# EAGLE board Bmp180Shield (EAGLE 7.4.0)
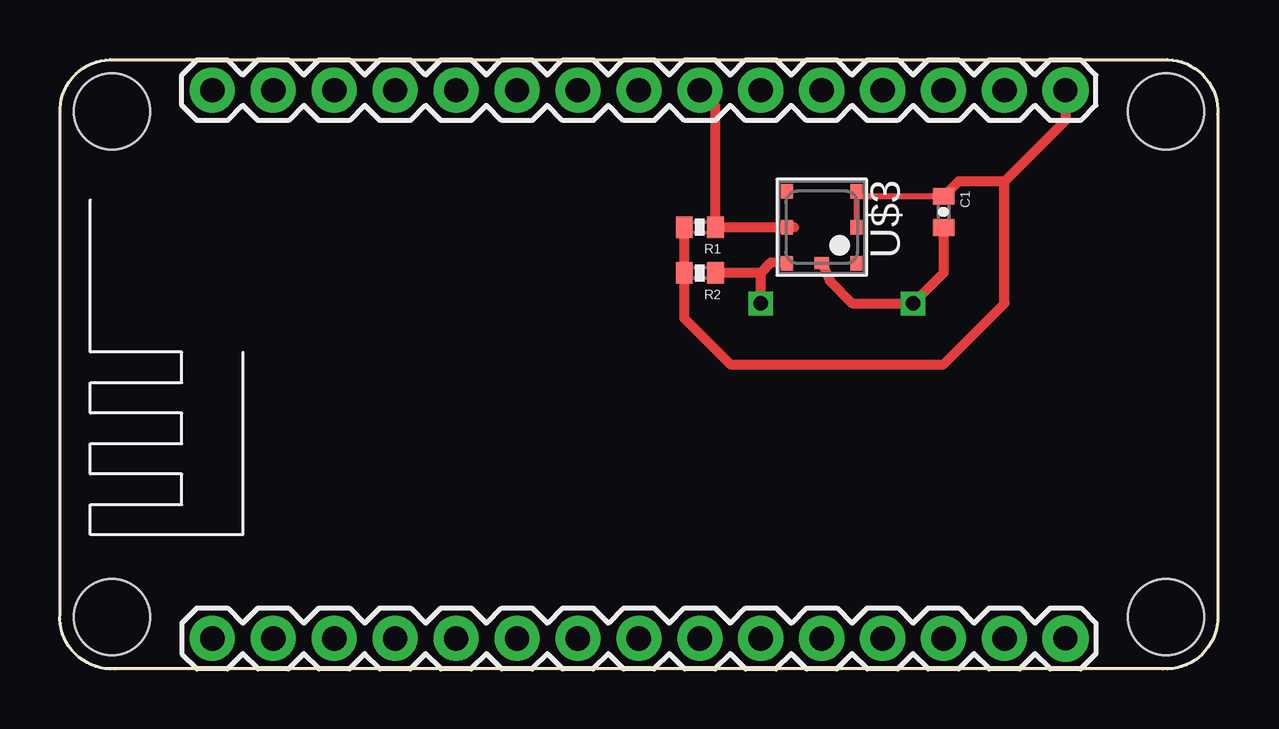
[diagram p0: board, top side]
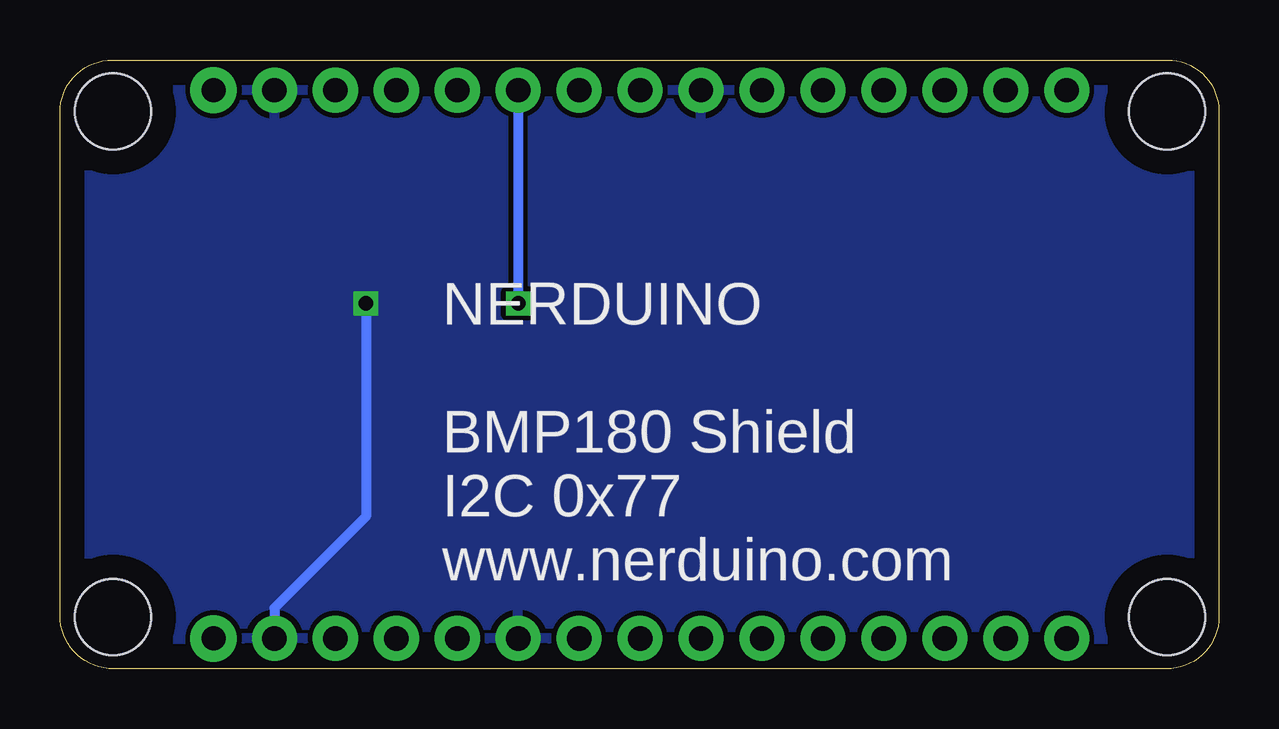
[diagram p1: board, bottom side, seen from below]

Size 48.31 x 25.39 mm. Coordinates in mm from the lower left corner, seen from the top.
Outline: 0,23.24 0,2.19 arc90 2.19,0 46.08,0 arc90 48.31,2.23 48.31,23.2 arc90 46.13,25.39 2.15,25.39 arc90 0,23.24
Copper layers (1*16): Top 0.035mm / dielectric 1.5mm / Bottom 0.035mm
Design rules "default": minimum track width 10mil, minimum drill 24mil, track to track 8mil, track to pad 8mil, pad to pad 8mil, via to via 8mil, smd to smd 8mil, copper to edge 40mil, drill to drill 8mil, minimum pad ring 10mil, minimum via ring 8mil, stop-mask expansion 4mil, vias tented up to drill 0mil, thermal gap 10mil

## Footprints (pad centres in the part's own frame; a part is rotated, then mirrored left to right if it is on the bottom)
0402-CAP = smd 0.7 x 0.9: 1 -0.65,0; 2 0.65,0
0402-RES = smd 0.7 x 0.9: 1 -0.65,0; 2 0.65,0
NERDUINO_STACK = drill 1.016 pad 1.88: 1 -17.78,-5.08; 2 -15.24,-5.08; 3 -12.7,-5.08; 4 -10.16,-5.08; 5 -7.62,-5.08; 6 -5.08,-5.08; 7 -2.54,-5.08; 8 0,-5.08; 9 2.54,-5.08; 10 5.08,-5.08; 11 7.62,-5.08; 12 10.16,-5.08; 13 12.7,-5.08; 14 15.24,-5.08; 17 15.24,17.78; 18 12.7,17.78; 19 10.16,17.78; 20 7.62,17.78; 21 5.08,17.78; 22 2.54,17.78; 23 0,17.78; 24 -2.54,17.78; 25 -5.08,17.78; 26 -7.62,17.78; 27 -10.16,17.78; 28 -12.7,17.78; 29 -15.24,17.78; 30 -17.78,17.78 | drill 1 pad 1.93: 15 17.78,-5.08; 16 17.78,17.78 | hole 3.175: -21.971,16.891; -21.971,-4.191; 21.971,-4.191; 21.971,16.891
BMP180 = smd 0.6 x 0.5: 1 1.5,1.45; 2 0,1.45; 3 -1.5,1.45; 4 -1.5,-1.45; 5 0,-1.45; 6 1.5,-1.45 | smd 0.5 x 0.6: 7 1.5,0

## Placement (x,y rotation side)
C1  0.1uF  [0402-CAP]  36.83,19.05 270 top
R1  4.7k  [0402-RES]  26.67,18.41 180 top
R2  4.7k  [0402-RES]  26.67,16.51 180 top
U$1  NERDSHIELD  [NERDUINO_STACK]  24.13,6.35 0 top
U$3  BMP180  [BMP180]  31.75,18.41 270 top

## Library data of the parts
C1 R1 R2 = SparkFun
U$1 = NerduinoShieldLib
U$3 = SparkFun-Sensors

## Nets
3.3V: C1.1 R1.2 R2.2 U$1.16 U$3.2 U$3.3
GND: C1.2 U$1.10 U$1.14 U$1.17 U$1.24 U$3.7
N$2: R2.1 U$1.21 U$3.6
N$3: R1.1 U$1.22 U$3.5

## Tracks (layer width: path | path; a pad name or v marks a point on that pad's centre or on a via)
3.3V
  Top 0.254: C1.1 33.2,19.7 U$3.3 U$3.2
  Top 0.406: U$1.16 41.91,22.86 39.37,20.32 | 39.37,20.32 37.45,20.32 C1.1 | R1.2 R2.2 26.02,14.62 27.94,12.7 36.83,12.7 39.37,15.24 39.37,20.32
GND  (via drill 0.6)
  Top 0.406: C1.2 36.83,16.51 v35.56,15.24 | v35.56,15.24 35.09,15.24 | U$3.7 32.09,16.18 33.02,15.24 v35.56,15.24
  Bottom 0.406: v35.56,15.24 35.56,6.35 39.37,2.54 U$1.14
  pour Bottom: 0,25.4 48.26,25.4 48.26,0 0,0
N$2  (via drill 0.6)
  Top 0.406: 29.21,16.51 R2.1 | v29.21,15.24 29.21,16.51 | U$3.6 29.64,16.95 29.21,16.51
  Bottom 0.406: U$1.21 v29.21,15.24
N$3
  Top 0.406: U$1.22 27.32,23.48 R1.1 U$3.5 30.61,18.41

## Text on the board
_bsilk: NERDUINO / / BMP180 Shield / I2C 0x77 / www.nerduino.com